# Altium PCB PCB_Tetris_C51.pcbdoc
Units mil, origin at the board's own origin, x right, y up, seen from the top; angles counter-clockwise.
Board outline 9270 x 8040 mil, 2 copper layers (Top Layer, Bottom Layer); 22 components, 46 nets, 162 pads, 61 vias.
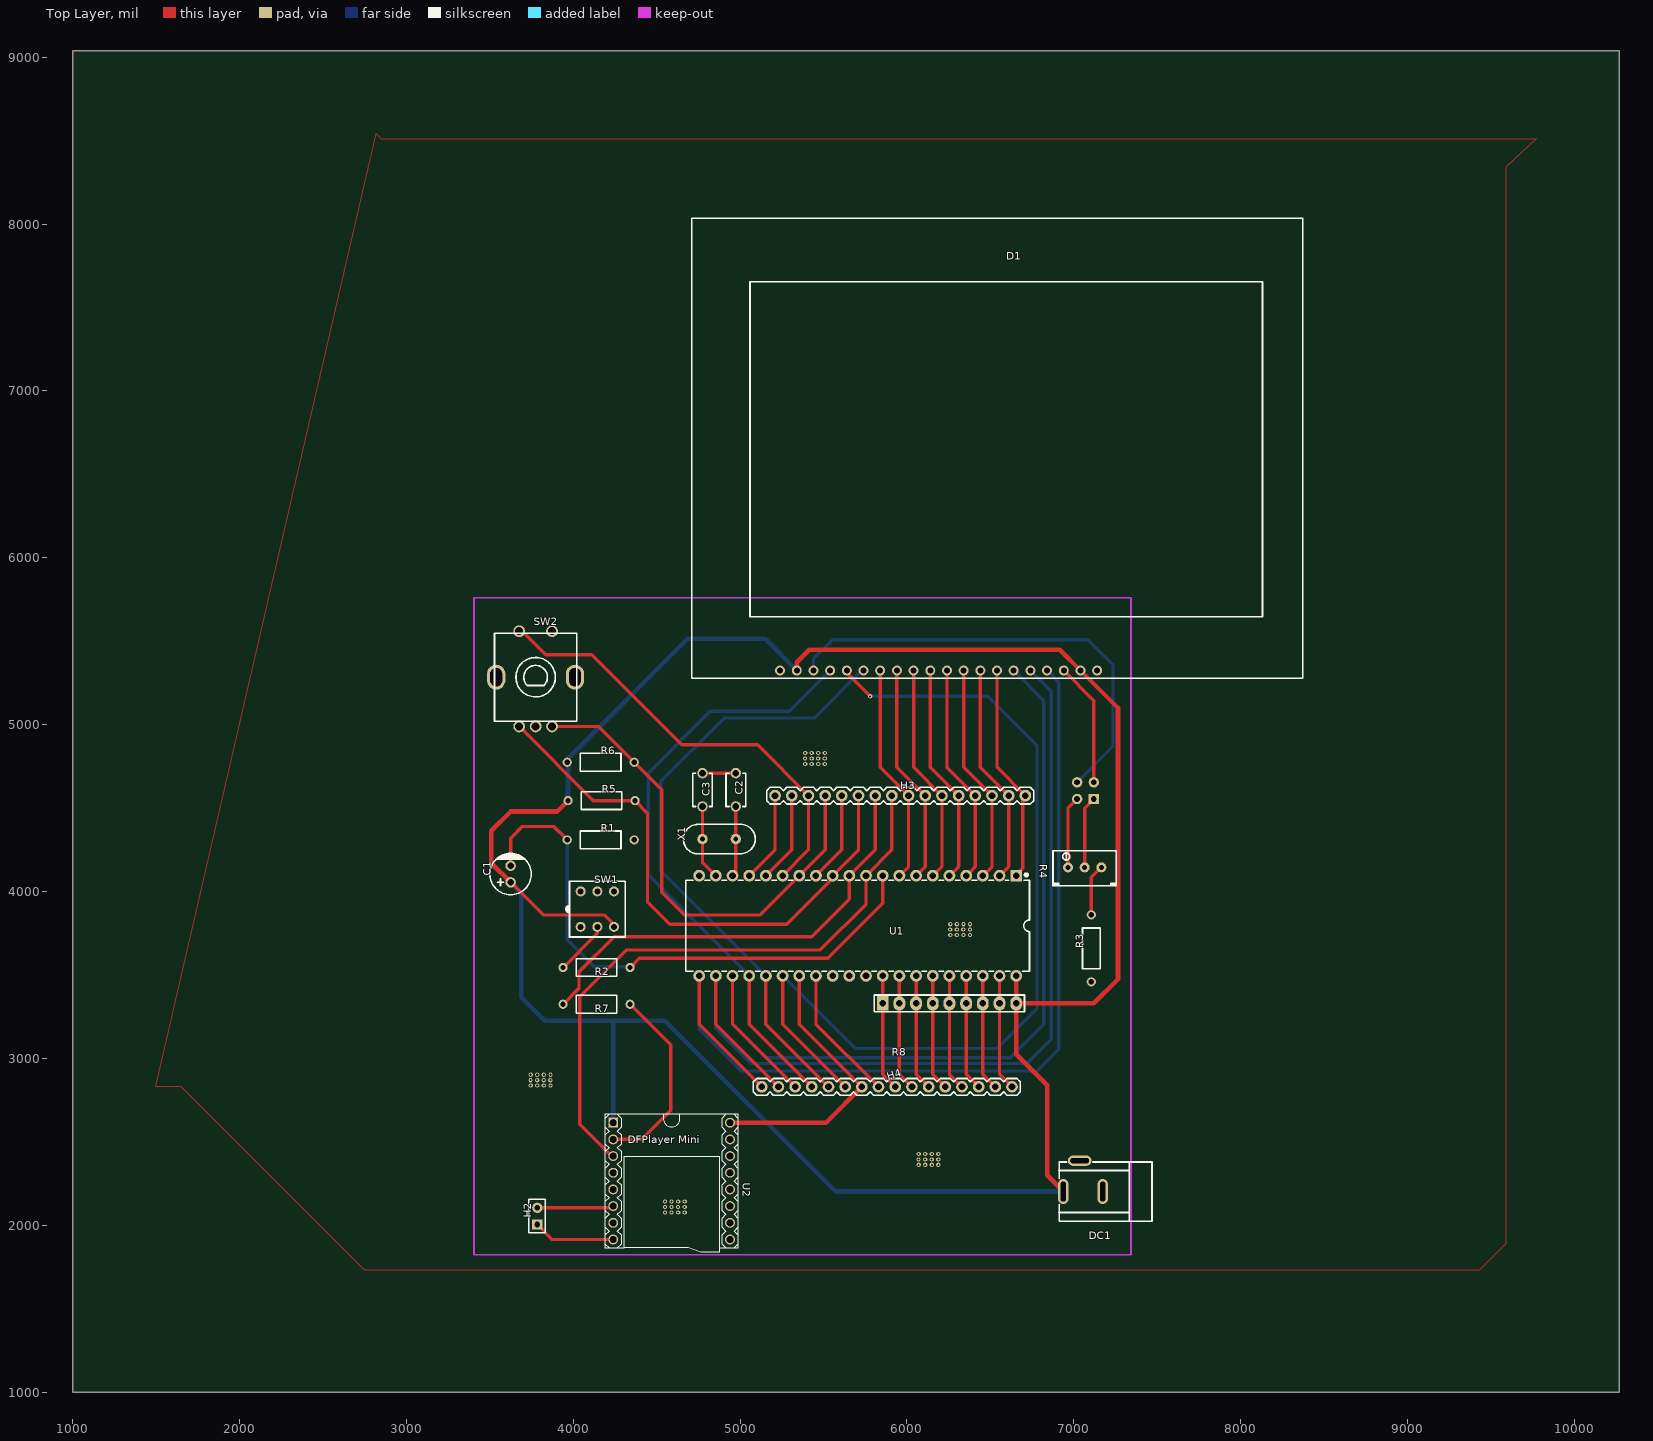
[diagram p0: Top Layer view]
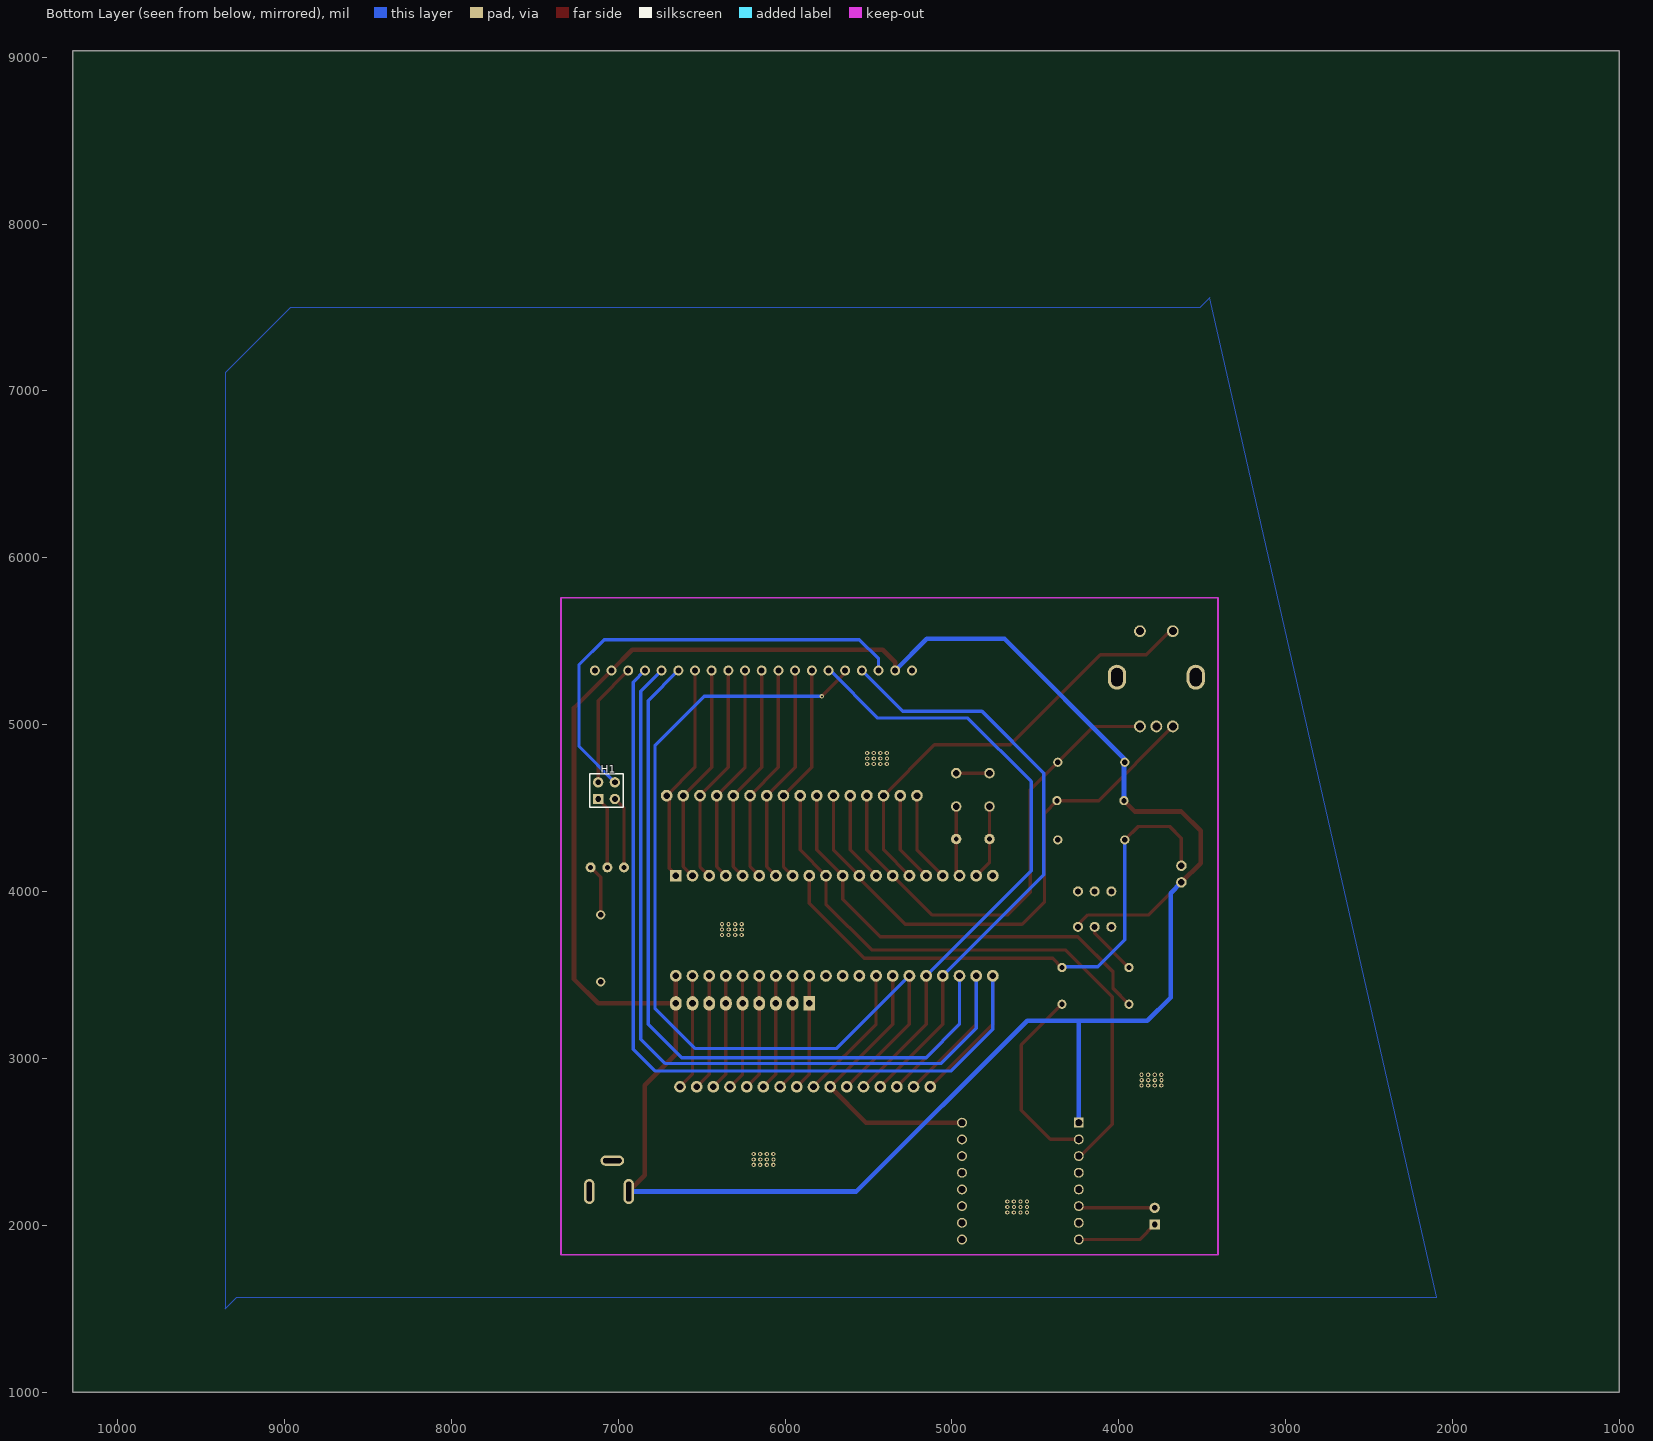
[diagram p1: Bottom Layer view, seen from below]

## Layer stack, top to bottom
Top Layer: signal copper (thickness not stored)
Dielectric: dielectric 12.6, FR-4, Dk 4.8
Bottom Layer: signal copper (thickness not stored)

## Board outline
10270,1000 1000,1000 1000,9040 10270,9040

## Components (designator, comment, footprint, x,y, rotation, side; value= is the part's Value field where it differs from the comment)
C1 "10uF" CAP-TH_BD6.3-P2.50-D1.0-FD 3625,4105 r90 top
C2 "30pf" CAP-TH_L5.0-W3.0-P5.00-D1.0 4975,4610 r90 top
C3 "30pf" CAP-TH_L5.0-W3.0-P5.00-D1.0 4775,4610 r90 top
D1 "12864ZW" 12864ZW 4710,8035 r0 top
DC1 "DC-005-5.5*2.5" DC-IN-TH_DC-005-2 7055,2295 r180 top
H1 "HDR-M-2.54_2x2" HDR-M-2.54_2X2 7070,4605 r270 bottom
H2 "HDR-F-2.54_1x2" HDR-F-2.54_1X2 3785,2055 r90 top
H3 "HDR-2.56MM-1X16P-MALE" HDR-2.56MM-1X16P-MALE 5210,4575 r0 top
H4 "HDR-2.56MM-1X16P-MALE" HDR-2.56MM-1X16P-MALE 5130,2830 r0 top
R1 "10k" RES-TH_BD2.7-L6.2-P10.20-D0.4 4165,4310 r0 top
R2 "1k" RES-TH_BD2.7-L6.2-P10.20-D0.4 4140,3545 r0 top
R3 "10k" RES-TH_BD2.7-L6.2-P10.20-D0.4 7105,3660 r90 top
R4 "10k" RES-ADJ-TH_3296W 7065,4145 r90 top
R5 "10k" RES-TH_BD2.7-L6.2-P10.20-D0.4 4170,4545 r0 top
R6 "10k" RES-TH_BD2.7-L6.2-P10.20-D0.4 4165,4775 r0 top
R7 "1k" RES-TH_BD2.7-L6.2-P10.20-D0.4 4140,3325 r0 top
R8 "R8×10K" R-SIP9 6255,3330 r0 top
SW1 "K8-8585D-L1" KEY-TH_6P-L8.5-W8.5-P2.54 4145,3895 r0 top
SW2 "旋转编码器_EC11" 旋转编码器_EC11 3775,5275 r0 top
U1 "STC89C54RD+-40I-DIP40" DIP-40_L52.3-W13.9-P2.54-LS15.2-BL 5705,3795 r180 top
U2 "DFPLAYER-MINI-MODULE" DFPLAYER-MINI-MODULE 4590,2265 r270 top
X1 "11.0592M" 11.0592M 4980,4315 r90 top

## Footprints (in the part's own frame and the unit in brackets; to place one, negate y for a bottom-side part, rotate by r counter-clockwise, add the part's x,y. Pads: shape width x height; smd on the part's side, far side on the other; paste and mask are expansions set on the pad)
11.0592M [mm]
  round 1.6 hole 0.7: 1(0,5.207) 2(0,0.127)
  silkscreen extent -2.26,-2.82 2.25,8.11
12864ZW [mil]
  round 60 hole 36: 1(2430,-2710) 2(2330,-2710) 3(2230,-2710) 4(2130,-2710) 5(2030,-2710) 6(1930,-2710) 7(1830,-2710) 8(1730,-2710) 9(1630,-2710) 10(1530,-2710) 11(1430,-2710) 12(1330,-2710) 13(1230,-2710) 14(1130,-2710) 15(1030,-2710) 16(930,-2710) 17(830,-2710) 18(730,-2710) 19(630,-2710) 20(530,-2710)
  silkscreen extent 0,-2756 3661,0
CAP-TH_BD6.3-P2.50-D1.0-FD [mm]
  round 1.6 hole 1: 1(-1.27,0) 2(1.27,0)
  silkscreen extent -3.15,-3.15 3.17,3.15
CAP-TH_L5.0-W3.0-P5.00-D1.0 [mm]
  round 1.6 hole 1: 1(-2.54,0) 2(2.54,0)
  silkscreen extent -2.54,-1.5 2.54,1.5
DC-IN-TH_DC-005-2 [mm]
  oval 1.6x3.8 hole 0.8 slot 3 at 90 deg: 1(3,2.35) 2(-3,2.35)
  oval 3.6x1.6 hole 0.8 slot 2.8 at 0 deg: 3(0.5,-2.35)
  silkscreen extent -10.5,-2.16 3.65,6.85
DFPLAYER-MINI-MODULE [mil]
  rect 59.37x59.37 hole 39.36: 1(-350,-350)
  round 59.37 hole 39.36: 2(-250,-350) 3(-150,-350) 4(-50,-350) 5(50,-350) 6(150,-350) 7(250,-350) 8(350,-350) 9(350,350) 10(250,350) 11(150,350) 12(50,350) 13(-50,350) 14(-150,350) 15(-250,350) 16(-350,350)
  silkscreen extent -400,-400 425,400
DIP-40_L52.3-W13.9-P2.54-LS15.2-BL [mm]
  rect 1.8x1.8 hole 1: 1(-24.13,-7.62)
  round 1.8 hole 1: 2(-21.59,-7.62) 3(-19.05,-7.62) 4(-16.51,-7.62) 5(-13.97,-7.62) 6(-11.43,-7.62) 7(-8.89,-7.62) 8(-6.35,-7.62) 9(-3.81,-7.62) 10(-1.27,-7.62) 11(1.27,-7.62) 12(3.81,-7.62) 13(6.35,-7.62) 14(8.89,-7.62) 15(11.43,-7.62) 16(13.97,-7.62) 17(16.51,-7.62) 18(19.05,-7.62) 19(21.59,-7.62) 20(24.13,-7.62) 21(24.13,7.62) 22(21.59,7.62) 23(19.05,7.62) 24(16.51,7.62) 25(13.97,7.62) 26(11.43,7.62) 27(8.89,7.62) 28(6.35,7.62) 29(3.81,7.62) 30(1.27,7.62) 31(-1.27,7.62) 32(-3.81,7.62) 33(-6.35,7.62) 34(-8.89,7.62) 35(-11.43,7.62) 36(-13.97,7.62) 37(-16.51,7.62) 38(-19.05,7.62) 39(-21.59,7.62) 40(-24.13,7.62)
  silkscreen extent -26.16,-7.95 26.16,6.93
HDR-2.56MM-1X16P-MALE [mil]
  round 70 hole 40: 1(0,0) 2(100,0) 3(200,0) 4(300,0) 5(400,0) 6(500,0) 7(600,0) 8(700,0) 9(800,0) 10(900,0) 11(1000,0) 12(1100,0) 13(1200,0) 14(1300,0) 15(1400,0) 16(1500,0)
  silkscreen extent -50,-50 1550,50
HDR-F-2.54_1X2 [mil]
  rect 62x62 hole 35: 1(-50,0)
  round 62 hole 35: 2(50,0)
  silkscreen extent -100,-49 100,50
HDR-M-2.54_2X2 [mil]
  rect 62x62 hole 35: 1(50,-50)
  round 62 hole 35: 2(-50,-50) 3(50,50) 4(-50,50)
  silkscreen extent -100,-100 100,100
KEY-TH_6P-L8.5-W8.5-P2.54 [mil]
  round 60 hole 36: 1(-100,-106.3) 2(0,-106.3) 3(100,-106.3) 4(-100,106.3) 5(0,106.3) 6(100,106.3)
  silkscreen extent -189,-167 167,167
R-SIP9 [mm]
  rect 1.8x2.2 hole 1: 1(-10.16,0)
  oval 1.8x2.2 hole 1: 2(-7.62,0) 3(-5.08,0) 4(-2.54,0) 5(0,0) 6(2.54,0) 7(5.08,0) 8(7.62,0) 9(10.16,0)
  silkscreen extent -11.43,-1.27 11.43,1.27
RES-ADJ-TH_3296W [mil]
  round 60 hole 30: 1(0,100.01) 2(0,0.01) 3(0,-99.99)
  silkscreen extent -110,-190 100,190
RES-TH_BD2.7-L6.2-P10.20-D0.4 [mm]
  round 1.4 hole 0.8: 1(-5.1,0) 2(5.1,0)
  silkscreen extent -3.1,-1.35 3.1,1.35
旋转编码器_EC11 [mm]
  round 1.8 hole 1.2: 1(-2.5,-7.25) 2(0,-7.25) 3(2.5,-7.25) 4(-2.5,7.25) 5(2.5,7.25)
  oval 2.8x3.8 hole 1.8 slot 2.8 at 90 deg: 7(-6,0.25) 8(6,0.25)
  silkscreen extent -6.25,-6.45 6.25,6.95

## Via types
v1: diameter 25.59, hole 12.2, Top Layer to Bottom Layer, tented both sides, 61 vias

## Nets (pads, with @x,y where several pads share a name; then routed paths per layer and width w, separated by ;. In a path a pad name is that pad's centre, name@x,y a point inside that pad or via, vN(x,y) a via of type N, cw(c..) or ccw(c..) an arc to the next point about the centre after c; other vN are vias at no path point)
+5V: C1.1 D1.2 D1.19 DC1.1 R5.1 R6.1 R8.9 SW1.3 U1.40 U2.1 | length 14543.6
  Top Layer w20: C1.1 3820,3860 4185,3860 4245,3800 SW1.3
  Top Layer w27.56: C1.1 3510,4170 3510,4365 3625,4480 3905,4480 R5.1 ; D1.19 5340,5375 5415,5450 6915,5450 D1.2 7265,5100 7265,3475 7120,3330 R8.9 ; U1.40 R8.9 ; DC1.1 6840,2299.39 6840,2840 6655,3025 R8.9
  Bottom Layer w27.56: C1.1 3690,3990 3690,3365 3830,3225 4550,3225 5572.5,2202.5 DC1.1 ; R5.1 3969.21,4770 R6.1 3964.2,4794.2 4685,5515 5150,5515 D1.19 ; U2.1 4240,3225
D1_3: D1.3 H1.2 | length 744.6
  Top Layer w19.84: D1.3 7120,5145 H1.2
D1_18: D1.18 H1.4 | length 2768.8
  Bottom Layer w19.84: D1.18 5440,5395 5555,5510 7085,5510 7235,5360 7235,4870 H1.4
GND: C2.2 C3.2 D1.1 D1.20 DC1.2 DC1.3 R1.2 R3.1 SW2.2 SW2.5 U1.20 U2.7 U2.10 | length 200
  Top Layer w20: C3.2 C2.2
  other v1: 4550.4,2077.36 4589.77,2077.36 4629.14,2077.36 4668.51,2077.36 4550,2110 4589.37,2110 4628.74,2110 4668.11,2110 4550.4,2142.36 4589.77,2142.36 4629.14,2142.36 4668.51,2142.36 6070.4,2362.36 6109.77,2362.36 6149.14,2362.36 6188.51,2362.36 6070,2395 6109.37,2395 6148.74,2395 6188.11,2395 6070.4,2427.36 6109.77,2427.36 6149.14,2427.36 6188.51,2427.36 3745.4,2837.36 3784.77,2837.36 3824.14,2837.36 3863.51,2837.36 3745,2870 3784.37,2870 3823.74,2870 3863.11,2870 3745.4,2902.36 3784.77,2902.36 3824.14,2902.36 3863.51,2902.36 6260,3740 6299.37,3740 6338.74,3740 6378.11,3740 6259.6,3772.64 6298.97,3772.64 6338.34,3772.64 6377.71,3772.64 6260,3805 6299.37,3805 6338.74,3805 6378.11,3805 5390,4765 5429.37,4765 5468.74,4765 5508.11,4765 5389.6,4797.64 5428.97,4797.64 5468.34,4797.64 5507.71,4797.64 5390,4830 5429.37,4830 5468.74,4830 5508.11,4830
INT0: H3.6 R5.2 SW2.1 U1.12 | length 3353.1
  Top Layer w20: SW2.1 4121.15,4545 R5.2 4445,4470.8 4445,3940 4580,3805 5280,3805 5555,4080 U1.12 5710,4250 H3.6
INT1: H3.5 U1.13 | length 544.2
  Top Layer w20: U1.13 5610,4250 H3.5
MCURX: H3.8 U1.10 U2.3 | length 3702.8
  Top Layer w20: U2.3 4230,2415 4040,2605 4040,3370 4320,3650 5480,3650 5755,3925 U1.10 5910,4250 H3.8
MCUTX: H3.7 R7.1 U1.11 | length 2719.1
  Top Layer w20: R7.1 4035,3420.79 4035,3520 4245,3730 5430,3730 5655,3955 U1.11 5810,4250 H3.7
P0.0: H4.16 R8.8 U1.39 | length 696.1
  Top Layer w20: U1.39 R8.8 6555,2905 H4.16
P0.1: H4.15 R8.7 U1.38 | length 696.1
  Top Layer w20: U1.38 R8.7 6455,2905 H4.15
P0.2: H4.14 R8.6 U1.37 | length 696.1
  Top Layer w20: U1.37 R8.6 6355,2905 H4.14
P0.3: H4.13 R8.5 U1.36 | length 696.1
  Top Layer w20: U1.36 R8.5 6255,2905 H4.13
P0.4: H4.12 R8.4 U1.35 | length 696.1
  Top Layer w20: U1.35 R8.4 6155,2905 H4.12
P0.5: H4.11 R8.3 U1.34 | length 696.1
  Top Layer w20: U1.34 R8.3 6055,2905 H4.11
P0.6: H4.10 R8.2 U1.33 | length 696.1
  Top Layer w20: U1.33 R8.2 5955,2905 H4.10
P0.7: H4.9 R8.1 U1.32 | length 696.1
  Top Layer w20: U1.32 R8.1 5855,2905 H4.9
P1.0: D1.7 H3.16 U1.1 | length 1323.2
  Top Layer w20: D1.7 6540,4745 H3.16 6695,4560 6695,4140 6655,4100 U1.1
P1.1: D1.8 H3.15 U1.2 | length 1323.2
  Top Layer w20: D1.8 6440,4745 H3.15 6610,4150 U1.2
P1.2: D1.9 H3.14 U1.3 | length 1323.2
  Top Layer w20: D1.9 6340,4745 H3.14 6510,4150 U1.3
P1.3: D1.10 H3.13 U1.4 | length 1323.2
  Top Layer w20: D1.10 6240,4745 H3.13 6410,4150 U1.4
P1.4: D1.11 H3.12 U1.5 | length 1323.2
  Top Layer w20: D1.11 6140,4745 H3.12 6310,4150 U1.5
P1.5: D1.12 H3.11 U1.6 | length 1323.2
  Top Layer w20: D1.12 6040,4745 H3.11 6210,4150 U1.6
P1.6: D1.13 H3.10 U1.7 | length 1323.2
  Top Layer w20: D1.13 5940,4745 H3.10 6110,4150 U1.7
P1.7: D1.14 H3.9 U1.8 | length 1323.2
  Top Layer w20: D1.14 5840,4745 H3.9 6010,4150 U1.8
P2.0: D1.4 H4.1 U1.21 | length 5751.7
  Top Layer w20: U1.21 4755,3205 H4.1
  Bottom Layer w19.84: U1.21 4755,3175 5005,2925 6780,2925 6910,3055 6910,5255 D1.4
P2.1: D1.5 H4.2 U1.22 | length 5554.2
  Top Layer w20: U1.22 4855,3205 H4.2
  Bottom Layer w19.84: U1.22 4855,3180 5065,2970 6720,2970 6865,3115 6865,5200 D1.5
P2.2: D1.6 H4.3 U1.23 | length 5335.6
  Top Layer w20: U1.23 4955,3205 H4.3
  Bottom Layer w19.84: U1.23 4955,3205 5155,3005 6620,3005 6820,3205 6820,5145 D1.6
P2.3: D1.17 H4.4 U1.24 | length 3630.7
  Top Layer w20: U1.24 5055,3205 H4.4
  Bottom Layer w20: U1.24 4450,4100 4450,4710 4820,5080 5295,5080 D1.17
P2.4: D1.15 H4.5 U1.25 | length 3736.7
  Top Layer w20: U1.25 5155,3205 H4.5
  Bottom Layer w20: U1.25 4525,4125 4525,4660 4905,5040 5445,5040 5730,5325 D1.15
P2.5: D1.16 H4.6 U1.26 | length 5535.1
  Top Layer w20: U1.26 5255,3205 H4.6 ; D1.16 5640,5310 v1(5780,5170)
  Bottom Layer w20: U1.26 5690,3060 6540,3060 6780,3300 6780,4875 6485,5170 v1(5780,5170)
P2.6: H4.7 U1.27 U2.16 | length 1699.4
  Top Layer w20: U1.27 5355,3205 H4.7
  Top Layer w27.56: U2.16 5515,2615 H4.7
P2.7: H4.8 U1.28 | length 820.3
  Top Layer w20: U1.28 5455,3205 H4.8
P3.4: H3.4 R6.2 SW2.3 U1.14 | length 2951.7
  Top Layer w20: SW2.3 4151.22,4989.57 R6.2 4530,4610.79 4530,3995 4665,3860 5120,3860 U1.14 5510,4250 H3.4
P3.5: H3.3 SW2.4 U1.15 | length 2685.8
  Top Layer w20: SW2.4 3694.6,5560.4 3835,5420 4110,5420 4650,4880 5105,4880 H3.3 5410,4250 U1.15
P3.6: H3.2 U1.16 | length 544.2
  Top Layer w20: U1.16 5310,4250 H3.2
P3.7: H3.1 U1.17 | length 544.2
  Top Layer w20: U1.17 5210,4250 H3.1
R3_2: R3.2 R4.3 | length 309.1
  Top Layer w19.84: R3.2 7105,4085 R4.3
R4_1: H1.3 R4.1 | length 432.8
  Top Layer w19.84: R4.1 6965,4500 H1.3
R4_2: H1.1 R4.2 | length 432.8
  Top Layer w19.84: R4.2 7065,4500 H1.1
RST: C1.2 R1.1 R2.2 U1.9 | length 3449.5
  Top Layer w20: C1.2 3625,4320 3695,4390 3884.2,4390 R1.1 ; R2.2 4395.8,3600 5525,3600 5855,3930 U1.9
  Bottom Layer w20: R1.1 3964.21,3710.79 4125,3550 4335.79,3550 R2.2
SW1_2: R2.1 SW1.2 | length 328.9
  Top Layer w20: R2.1 4145,3750.79 SW1.2
U2_2: R7.2 U2.2 | length 1153.6
  Top Layer w20: U2.2 4410,2515 4585,2690 4585,3080.79 R7.2
U2_6: H2.2 U2.6 | length 459.1
  Top Layer w20: H2.2 4230,2105 U2.6
U2_8: H2.1 U2.8 | length 492.3
  Top Layer w20: H2.1 3875,1915 U2.8
XTAL1: C3.1 U1.19 X1.1 | length 448.1
  Top Layer w20: C3.1 X1.1 4775,4175 U1.19
XTAL2: C2.1 U1.18 X1.2 | length 423.3
  Top Layer w20: U1.18 4975,4115 X1.2 C2.1
pads on no net: SW1.1 SW1.4 SW1.5 SW1.6 SW2.7 SW2.8 U1.29 U1.30 U1.31 U2.4 U2.5 U2.9 U2.11 U2.12 U2.13 U2.14 U2.15

## Polygon pours and split planes (outlines as drawn)
GND on Bottom Layer (solid): 3455,7560 3515,7500 8965,7500 9355,7110 9355,1500 9285,1570 2095,1570
GND on Top Layer (solid): 2820,8540 2850,8510 9770,8510 9590,8340 9590,1890 9430,1730 2750,1730 1650,2830 1500,2830

## Text inside footprints (layer, text, board x,y; h text height)
U2: Top Overlay "DFPlayer Mini" at 4326.75,2492.5 h45